# EAGLE board BlueBus (EAGLE 9.6.2)
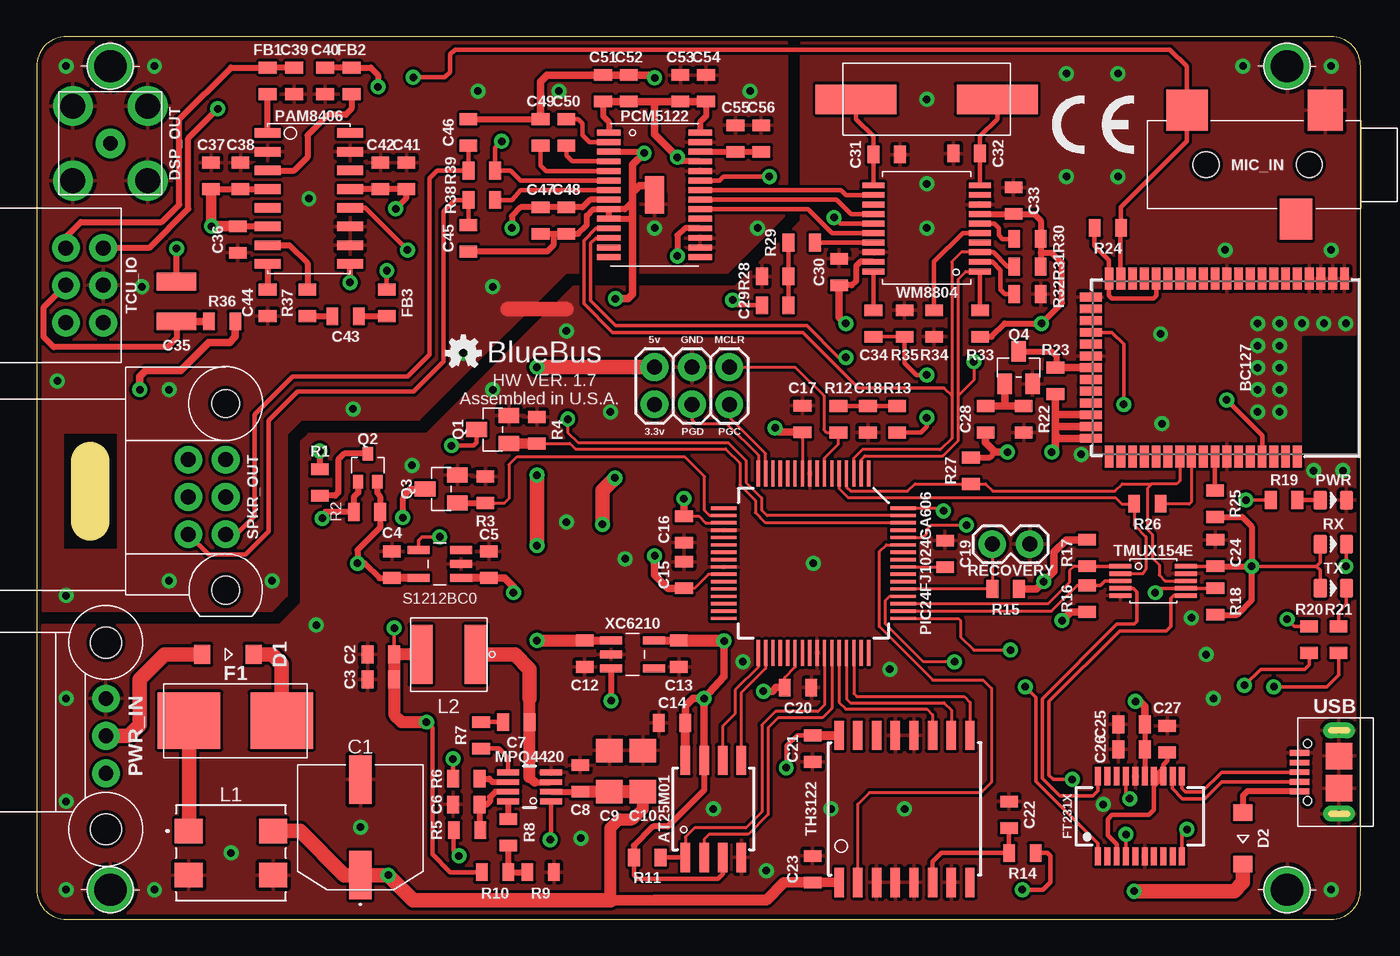
[diagram p0: board, top side]
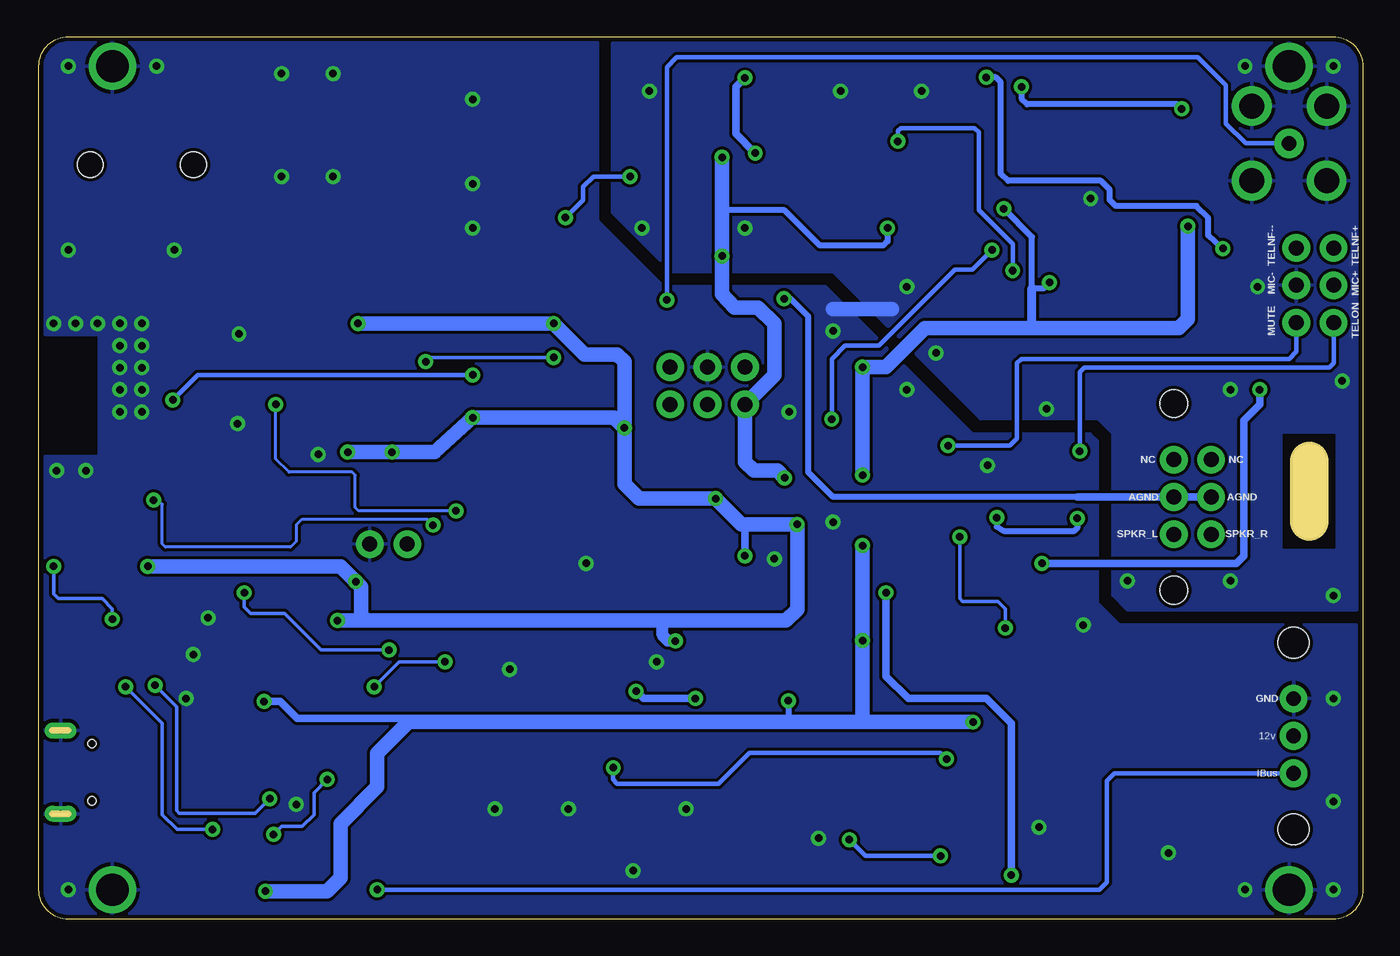
[diagram p1: board, bottom side, seen from below]

Size 90 x 60 mm. Coordinates in mm from the lower left corner, seen from the top.
Outline: 0,58 0,2 arc90 2,0 88,0 arc90 90,2 90,58 arc90 88,60 2,60 arc90 0,58
Copper layers (1*16): Top 0.035mm / dielectric 1.5mm / Bottom 0.035mm
Design rules "SparkFun": minimum track width 8mil, minimum drill 20mil, track to track 8mil, track to pad 8mil, pad to pad 7mil, via to via 8mil, smd to smd 7mil, copper to edge 10mil, drill to drill 8mil, minimum pad ring 12mil, minimum via ring 10mil, stop-mask expansion 4mil, vias tented up to drill 0.52mm, thermal gap 10mil
Net classes: 0 default: width 0.25 mm, drill 0.51 mm; 1 5V: width 0.55 mm, drill 0.51 mm; 2 3.3V: width 0.22 mm, drill 0.51 mm; 3 VIN: width 0.3 mm, drill 0.51 mm; 4 Data: width 0.25 mm, drill 0.51 mm; 5 MCU_Data: width 0.22 mm, drill 0.51 mm; 6 USB_5V: width 0.25 mm, drill 0.51 mm; 7 MCU_3V3: width 0.22 mm, drill 0.51 mm

## Footprints (pad centres in the part's own frame; a part is rotated, then mirrored left to right if it is on the bottom)
SOIJ-8 = smd 0.65 x 2: 1 -1.905,-3.3; 2 -0.635,-3.3; 3 0.635,-3.3; 4 1.905,-3.3; 5 1.905,3.3; 6 0.635,3.3; 7 -0.635,3.3; 8 -1.905,3.3
BC127 = smd 1.5 x 0.6: 1 -6.05,8.1; 2 -6.05,7.3; 3 -6.05,6.5; 4 -6.05,5.7; 5 -6.05,4.9; 6 -6.05,4.1; 7 -6.05,3.3; 8 -6.05,2.5; 9 -6.05,1.7; 10 -6.05,0.9; 11 -6.05,0.1; 12 -6.05,-0.7; 13 -6.05,-1.5; 14 -6.05,-2.3; 15 -6.05,-3.1; 16 -6.05,-3.9; 17 -6.05,-4.7; 18 -6.05,-5.5; 19 -6.05,-6.3; 20 -6.05,-7.1; 21 -6.05,-7.9; 35 6.05,-7.9; 36 6.05,-7.1; 37 6.05,-6.3; 38 6.05,-5.5; 39 6.05,-4.7; 40 6.05,-3.9; 41 6.05,-3.1; 42 6.05,-2.3; 43 6.05,-1.5; 44 6.05,-0.7; 45 6.05,0.1; 46 6.05,0.9; 47 6.05,1.7; 48 6.05,2.5; 49 6.05,3.3; 50 6.05,4.1; 51 6.05,4.9 | smd 0.6 x 1.5: 22 -4.8,-9.15; 23 -4,-9.15; 24 -3.2,-9.15; 25 -2.4,-9.15; 26 -1.6,-9.15; 27 -0.8,-9.15; 28 0,-9.15; 29 0.8,-9.15; 30 1.6,-9.15; 31 2.4,-9.15; 32 3.2,-9.15; 33 4,-9.15; 34 4.8,-9.15
RHS1V101MCN1GS = smd 3.3 x 1.5: 1 -3.25,0; 2 3.25,0
0805 = smd 0.8 x 1.2: 1 -0.9,0; 2 0.9,0
1206 = smd 1.6 x 1.8: 1 -1.4,0; 2 1.4,0
1210 = smd 1.2 x 2.7: 1 -1.35,0; 2 1.35,0
SOD123FL-2 = smd 1.1 x 1.3: A 1.75,0; C -1.75,0
MOLEX_SMB = drill 1.7 pad 2.7: 1 -2.54,2.54; 2 2.54,2.54; 3 2.54,-2.54; 4 -2.54,-2.54 | drill 1 pad 2: P$1 0,0
LITTLEFUSE = smd 3.81 x 4.242: IN 0,3.151; OUT 0,-3.151
SSOP20_L = smd 0.4 x 1.25: 1 -2.857,-2.725; 2 -2.223,-2.725; 3 -1.587,-2.725; 4 -0.953,-2.725; 5 -0.318,-2.725; 6 0.318,-2.725; 7 0.953,-2.725; 8 1.587,-2.725; 9 2.223,-2.725; 10 2.857,-2.725; 11 2.857,2.725; 12 2.223,2.725; 13 1.587,2.725; 14 0.953,2.725; 15 0.318,2.725; 16 -0.318,2.725; 17 -0.953,2.725; 18 -1.587,2.725; 19 -2.223,2.725; 20 -2.857,2.725
2.2-PAD = drill 2.2 pad 3: B2.2 0,0
ACM70V-701-2PL-TL00 = smd 1.905 x 1.651: 1 -2.857,1.5; 2 -2.857,-1.5; 3 2.857,-1.5; 4 2.857,1.5
MPL-SE5040 = smd 1.5 x 4: 1 1.85,0; 2 -1.85,0
AUDIO-CUI-SJ-352X-SMT = smd 2.2 x 2.8: RING 4.4,3.7 | smd 2.4 x 2.8: SLEEVE 2.4,-3.7 | smd 2.8 x 2.8: TIP 11.8,-3.7 | hole 1.75: 3.5,0; 10.5,0
TSOT23-8 = smd 0.4 x 1.5: 1 -0.975,-1.45; 2 -0.325,-1.45; 3 0.325,-1.45; 4 0.975,-1.45; 5 0.975,1.45; 6 0.325,1.45; 7 -0.325,1.45; 8 -0.975,1.45
SOP-16 = smd 0.65 x 1.75: 1 -4.45,-2.8; 2 -3.18,-2.8; 3 -1.91,-2.8; 4 -0.64,-2.8; 5 0.63,-2.8; 6 1.9,-2.8; 7 3.17,-2.8; 8 4.44,-2.8; 9 4.44,2.8; 10 3.17,2.8; 11 1.9,2.8; 12 0.63,2.8; 13 -0.64,2.8; 14 -1.91,2.8; 15 -3.18,2.8; 16 -4.45,2.8
TSSOP28 = smd 1.6 x 0.4: 1 -3.1,4.225; 2 -3.1,3.575; 3 -3.1,2.925; 4 -3.1,2.275; 5 -3.1,1.625; 6 -3.1,0.975; 7 -3.1,0.325; 8 -3.1,-0.325; 9 -3.1,-0.975; 10 -3.1,-1.625; 11 -3.1,-2.275; 12 -3.1,-2.925; 13 -3.1,-3.575; 14 -3.1,-4.225; 15 3.1,-4.225; 16 3.1,-3.575; 17 3.1,-2.925; 18 3.1,-2.275; 19 3.1,-1.625; 20 3.1,-0.975; 21 3.1,-0.325; 22 3.1,0.325; 23 3.1,0.975; 24 3.1,1.625; 25 3.1,2.275; 26 3.1,2.925; 27 3.1,3.575; 28 3.1,4.225
TQFP64 = smd 0.22 x 1.75: 1 -3.75,-6.1; 2 -3.25,-6.1; 3 -2.75,-6.1; 4 -2.25,-6.1; 5 -1.75,-6.1; 6 -1.25,-6.1; 7 -0.75,-6.1; 8 -0.25,-6.1; 9 0.25,-6.1; 10 0.75,-6.1; 11 1.25,-6.1; 12 1.75,-6.1; 13 2.25,-6.1; 14 2.75,-6.1; 15 3.25,-6.1; 16 3.75,-6.1; 33 3.75,6.1; 34 3.25,6.1; 35 2.75,6.1; 36 2.25,6.1; 37 1.75,6.1; 38 1.25,6.1; 39 0.75,6.1; 40 0.25,6.1; 41 -0.25,6.1; 42 -0.75,6.1; 43 -1.25,6.1; 44 -1.75,6.1; 45 -2.25,6.1; 46 -2.75,6.1; 47 -3.25,6.1; 48 -3.75,6.1 | smd 1.75 x 0.22: 17 6.1,-3.75; 18 6.1,-3.25; 19 6.1,-2.75; 20 6.1,-2.25; 21 6.1,-1.75; 22 6.1,-1.25; 23 6.1,-0.75; 24 6.1,-0.25; 25 6.1,0.25; 26 6.1,0.75; 27 6.1,1.25; 28 6.1,1.75; 29 6.1,2.25; 30 6.1,2.75; 31 6.1,3.25; 32 6.1,3.75; 49 -6.1,3.75; 50 -6.1,3.25; 51 -6.1,2.75; 52 -6.1,2.25; 53 -6.1,1.75; 54 -6.1,1.25; 55 -6.1,0.75; 56 -6.1,0.25; 57 -6.1,-0.25; 58 -6.1,-0.75; 59 -6.1,-1.25; 60 -6.1,-1.75; 61 -6.1,-2.25; 62 -6.1,-2.75; 63 -6.1,-3.25; 64 -6.1,-3.75
2X3 = drill 1.016 pad 1.88: 1 0,0; 2 0,2.54; 3 2.54,0; 4 2.54,2.54; 5 5.08,0; 6 5.08,2.54
LED-0805 = smd 0.889 x 1.27: + -0.889,0; - 0.889,0
TE_MQS_3PIN = drill 1 pad 1.88: 1 0,0; 2 2.54,0; 3 5.08,0 | hole 2.1: -3.81,0; 8.89,0
SOT-23 = smd 1 x 1.4: 1 -0.95,-1.1; 2 0.95,-1.1; 3 0,1.1
SOT323 = smd 0.7 x 0.9: 1 -0.65,-0.95; 2 0.65,-0.95; 3 0,0.95
1X02 = drill 1.016 pad 1.88: 1 0,0; 2 2.54,0
SOT23-5 = smd 0.55 x 1.5: 1 -0.95,-1.45; 2 0,-1.45; 3 0.95,-1.45; 4 0.95,1.45; 5 -0.95,1.45
SHORT_TOP-50 = smd 1.27 x 1.27: 1 0.635,0; 2 -0.635,0
TE_MQS_6PIN = drill 1.016 pad 1.88: 1 5.08,2.54; 2 2.54,2.54; 3 0,2.54; 4 5.08,0; 5 2.54,0; 6 0,0 | hole 1.9: -3.81,2.54; 8.89,2.54
TE_AMPMODU_6_PIN = drill 1.016 pad 1.88: 1 -2.54,-1.27; 2 -2.54,1.27; 3 0,-1.27; 4 0,1.27; 5 2.54,-1.27; 6 2.54,1.27
SOIC16DF = smd 0.635 x 2: 1 -4.45,-5; 2 -3.18,-5; 3 -1.91,-5; 4 -0.64,-5; 5 0.63,-5; 6 1.9,-5; 7 3.17,-5; 8 4.44,-5; 9 4.44,5; 10 3.17,5; 11 1.9,5; 12 0.63,5; 13 -0.64,5; 14 -1.91,5; 15 -3.18,5; 16 -4.45,5
VSSOP10 = smd 1.5 x 0.3: 1 -2.225,1; 2 -2.225,0.5; 3 -2.225,0; 4 -2.225,-0.5; 5 -2.225,-1; 6 2.225,-1; 7 2.225,-0.5; 8 2.225,0; 9 2.225,0.5; 10 2.225,1
USB3080-30-01-A = smd 0.4 x 1.35: 1 -1.3,0; 2 -0.65,0; 3 0,0; 4 0.65,0; 5 1.3,0 | drill 0.45 pad 1.075 long: MNT1 -2.825,-2.68; MNT2 2.825,-2.68 | smd 1.8 x 1.8: MNT3 -1.1,-2.68; MNT4 1.1,-2.68 | hole 0.55: -1.95,-0.53; 1.95,-0.53
SSOP20 = smd 0.4 x 1.5: 1 -2.955,-3.625; 2 -2.305,-3.625; 3 -1.655,-3.625; 4 -1.005,-3.625; 5 -0.355,-3.625; 6 0.295,-3.625; 7 0.945,-3.625; 8 1.595,-3.625; 9 2.245,-3.625; 10 2.895,-3.625; 11 2.895,3.625; 12 2.245,3.625; 13 1.595,3.625; 14 0.945,3.625; 15 0.295,3.625; 16 -0.355,3.625; 17 -1.005,3.625; 18 -1.655,3.625; 19 -2.305,3.625; 20 -2.955,3.625
HC49 = smd 5.5 x 2: 1 -4.8,0; 2 4.8,0

## Placement (x,y rotation side)
AT25M01  AT25M01-SHM  [SOIJ-8]  46,7.5 0 top
BC127  BC127  [BC127]  80.8,37.5 270 top
C1  RHS1V101MCN1GS  [RHS1V101MCN1GS]  22,6.25 90 top
C2  22uF  [0805]  23.4,18 180 top
C3  22uF  [0805]  23.4,16.3 180 top
C4  2.2uF  [0805]  24.14,24.11 90 top
C5  1uF  [0805]  30.74,24.1 90 top
C6  0.1uF  [0805]  29.2,7.8 180 top
C7  0.1uF  [0805]  32.6,13.4 0 top
C8  0.1uF  [0805]  36.95,9.57 90 top
C9  10uF  [1206]  38.92,10.07 90 top
C10  10uF  [1206]  41.2,10.07 90 top
C12  1uF  [0805]  37.25,18.05 270 top
C13  1uF  [0805]  43.65,18.05 270 top
C14  0.1uF  [0805]  43.19,13.35 180 top
C15  0.1uF  [0805]  44,23.4 270 top
C16  0.1uF  [0805]  44,26.5 90 top
C17  0.1uF  [0805]  52.05,34.01 270 top
C18  0.1uF  [0805]  56.5,34 270 top
C19  10uF  [0805]  61.75,24.84 90 top
C20  0.1uF  [0805]  51.75,15.75 180 top
C21  2.2uF  [0805]  52.75,11.6 90 top
C22  0.0001UF  [0805]  66.1,7.1 90 top
C23  47nF  [0805]  52.75,3.4 90 top
C24  0.1uF  [0805]  80.12,24.9 90 top
C25  0.1uF  [0805]  74.42,13.25 180 top
C26  10uF  [0805]  74.42,11.55 180 top
C27  0.1uF  [0805]  76.85,12.25 90 top
C28  470NF  [0805]  64.5,34 90 top
C29  0.1uF  [0805]  50.2,41.75 0 top
C30  0.1uF  [0805]  54.55,44 90 top
C31  20pF  [0805]  57.78,52 0 top
C32  20pF  [0805]  63.22,52.06 180 top
C33  1uF  [0805]  66.4,48.85 90 top
C34  0.1uF  [0805]  56.88,40.5 270 top
C35  47UF1210  [1210]  9.5,42 270 top
C36  1uF  [0805]  13.67,46.21 270 top
C37  10uF  [0805]  11.85,50.54 90 top
C38  1uF  [0805]  13.85,50.54 90 top
C39  220pF  [0805]  17.5,57 270 top
C40  220pF  [0805]  19.6,57 270 top
C41  10uF  [0805]  25.13,50.54 90 top
C42  1uF  [0805]  23.37,50.54 90 top
C43  1uF  [0805]  21,41 180 top
C44  1uF  [0805]  15.7,41.9 270 top
C45  10nF  [0805]  29.35,46.3 270 top
C46  10nF  [0805]  29.35,53.5 90 top
C47  10uF  [0805]  34.25,47.5 270 top
C48  0.1uF  [0805]  36,47.5 270 top
C49  2.2uF  [0805]  34.25,53.5 270 top
C50  2.2uF  [0805]  36,53.5 270 top
C51  0.1uF  [0805]  38.5,56.5 90 top
C52  10uF  [0805]  40.25,56.5 90 top
C53  10uF  [0805]  43.75,56.5 90 top
C54  0.1uF  [0805]  45.5,56.5 90 top
C55  0.1uF  [0805]  47.5,53.08 90 top
C56  10uF  [0805]  49.25,53.08 90 top
CE  [CE-4MM]  69,52 0 top
D1  2A_150V  [SOD123FL-2]  13,18 180 top
D2  2A_150V  [SOD123FL-2]  82,5.5 90 top
DSP_OUT  SMB_CONN  [MOLEX_SMB]  5,52.75 180 top
F1  750mA  [LITTLEFUSE]  13.5,13.5 270 top
FB1  2A/120OHM  [0805]  15.7,57 90 top
FB2  2A/120OHM  [0805]  21.4,57 90 top
FB3  2A/120OHM  [0805]  23.8,41.9 270 top
FRAME1  FRAME-LETTER  [DUMMY]  45,61 0 top
FRAME2  FRAME-LETTER  [DUMMY]  45,61 0 top
FRAME3  FRAME-LETTER  [DUMMY]  45,61 0 top
FRAME4  FRAME-LETTER  [DUMMY]  45,61 0 top
FRAME5  FRAME-LETTER  [DUMMY]  45,61 0 top
FT231X  FT231XS  [SSOP20_L]  75,7 0 top
H1  2,2-PAD  [2.2-PAD]  5,2 0 top
H2  2,2-PAD  [2.2-PAD]  5,58 0 top
H3  2,2-PAD  [2.2-PAD]  85,2 0 top
H4  2,2-PAD  [2.2-PAD]  85,58 0 top
L1  ACM70V-701-2PL-TL00  [ACM70V-701-2PL-TL00]  13.2,4.5 0 top
L2  10uH  [MPL-SE5040]  28,18 0 top
MIC_IN  AUDIO-CUI-SJ-3523-SMT  [AUDIO-CUI-SJ-352X-SMT]  90,51.3 180 top
MPQ4420  MPQ4420  [TSOT23-8]  33.5,9 90 top
OSHW  [OSHW-LOGO-MINI]  29,38.5 0 top
PAM8406  PAM8406  [SOP-16]  18.5,49 270 top
PCM5122  PCM5122  [TSSOP28]  42,49.25 0 top
PIC24FJ1024GA606  PIC24FJ1024GA606  [TQFP64]  52.8,24.2 180 top
PICKIT  6PIN_JUMPER  [2X3]  42,35 0 top
PWR  LED_GREEN  [LED-0805]  88.15,28.5 0 top
PWR_IN  3PIN_953442_1  [TE_MQS_3PIN]  4.7,15 270 top
Q1  NMOSFET-BSS138K  [SOT-23]  31,33.3 90 top
Q2  PMOSFET-DMP32D4SSOT323  [SOT323]  22.5,30.7 0 top
Q3  NMOSFET-BSS138K  [SOT-23]  27.5,29.25 90 top
Q4  FDV301N  [SOT-23]  66.75,37.5 0 top
R1  4.7k  [0805]  19.25,29.7 90 top
R2  10k  [0805]  22.45,27.69 0 top
R3  10k  [0805]  30.5,29.2 270 top
R4  10k  [0805]  34,33.25 270 top
R5  100k  [0805]  29.25,6.05 0 top
R6  100k  [0805]  29.2,9.55 180 top
R7  20OHM  [0805]  30.2,12.5 90 top
R8  51KOHM  [0805]  32.05,5.9 90 top
R9  7.68KOHM  [0805]  34.25,3.2 180 top
R10  41.2KOHM  [0805]  31.15,3.2 180 top
R11  4.7k  [0805]  41.5,4.2 180 top
R12  210  [0805]  54.5,34 270 top
R13  10k  [0805]  58.5,34 90 top
R14  10  [0805]  67,4.5 180 top
R15  10k  [0805]  65.86,22.45 0 top
R16  100k  [0805]  71.4,21.8 270 top
R17  10k  [0805]  71.4,24.9 270 top
R18  100k  [0805]  80.12,21.6 270 top
R19  2k  [0805]  84.8,28.5 180 top
R20  2k  [0805]  86.5,19 270 top
R21  2k  [0805]  88.5,19 270 top
R22  100k  [0805]  67.1,34 90 top
R23  100k  [0805]  69.25,36.6 90 top
R24  2k  [0805]  72.81,47 180 top
R25  10k  [0805]  80.1,28.25 270 top
R26  10k  [0805]  75.5,28.25 180 top
R27  10k  [0805]  63.5,30.5 90 top
R28  110  [0805]  50.2,43.7 0 top
R29  210  [0805]  52,46 0 top
R30  10k  [0805]  67.35,46.25 180 top
R31  4.7k  [0805]  67.35,44.38 180 top
R32  10k  [0805]  67.35,42.5 180 top
R33  4.7k  [0805]  64.13,40.5 90 top
R34  10k  [0805]  61,40.5 90 top
R35  75  [0805]  59,40.5 270 top
R36  10k  [0805]  12.6,40.65 180 top
R37  18k  [0805]  18.4,41.9 90 top
R38  100  [0805]  30.25,48.9 180 top
R39  100  [0805]  30.25,50.9 180 top
RECOVERY  2PIN_JUMPER  [1X02]  67.5,25.5 180 top
RX  LED_GREEN  [LED-0805]  88.15,25.5 0 top
S1212BC0  S-1212BC0-M5T1U  [SOT23-5]  27.4,24.15 90 top
SH1  SHORTT5  [SHORT_TOP-50]  42,49.25 270 top
SPKR_OUT  6PIN_953442_1  [TE_MQS_6PIN]  10.3,31.25 270 top
TCU_IO  6PIN_5_103166_1  [TE_AMPMODU_6_PIN]  3.25,43.1 270 top
TH3122  TH3122.4  [SOIC16DF]  59,7.5 0 top
TMUX154E  TMUX154E  [VSSOP10]  75.9,23 0 top
TX  LED_RED  [LED-0805]  88.15,22.5 0 top
USB  USB3080-30-01-A  [USB3080-30-01-A]  85.85,10 90 top
WM8804  WM8804  [SSOP20]  60.5,47 90 top
X1  CRYSTAL-12MHZ  [HC49]  60.5,55.75 180 top
XC6210  [SOT23-5]  40.5,18 270 top

## Library data of the parts
AT25M01 BC127 FT231X MPQ4420 PAM8406 PCM5122 PIC24FJ1024GA606 S1212BC0 TH3122 TMUX154E WM8804 XC6210 = ICs
C1 = Passives; MFG: Nichicon; PN: RHS1V101MCN1GS
C2 C3 = Passives; DEVICE: 22uF-0805-6.3v-10%; MFG: TDK; PACKAGE: 0805; PN: C2012X5R0J226K125AB
C4 C21 C49 C50 = Passives; DEVICE: 2.2uF-0805-25V-10%; MFG: TDK; PACKAGE: 0805; PN: CGB4B1X5R1E225K055AC
C5 C12 C13 C33 C36 C38 C42-C44 = Passives; DEVICE: 1uF-0805-50v-10%; MFG: TDK; PACKAGE: 0805; PN: CGA4J3X7R1H105K125AB
C6-C8 C14-C18 C20 C24 C25 C27 C29 C30 C34 C48 C51 C54 C55 = Passives; DEVICE: 0.1uF-0805-50V; MFG: KEMET; PACKAGE: 0805; PN: C0805C104J5RACAUTO
C9 C10 = Passives; DEVICE: 10UF-1206-50V-10%; MFG: TDK; PACKAGE: 1206; PN: CGA5L3X5R1H106K160AB
C19 C26 C37 C41 C47 C52 C53 C56 = Passives; DEVICE: 10UF-0805-35V-10%; MFG: TDK; PACKAGE: 0805; PN: C2012X5R1V106K125AC
C22 C35 PWR Q1-Q4 R7-R10 R12 R28 R29 RX TX = Passives
C23 = Passives; DEVICE: 47NF-0805-25V; MFG: AVX; PACKAGE: 0805; PN: 08053C473KAT4A
C28 = Passives; MFG: TDK; PN: CGA4J2X7R1E474K125AA
C31 C32 = Passives; DEVICE: 20pF-0805-50v-5%; PACKAGE: 0805; PN: C0805X200J5GAC7800
C39 C40 = Passives; DEVICE: 220PF-0805-50V-5%; MFG: KEMET; PACKAGE: 0805; PN: C0805X221J5HACAUTO
C45 C46 = Passives; DEVICE: 10NF-0805-50V; MFG: KEMET; PACKAGE: 0805; PN: C0805C103J5GEC7210
CE = logo
D1 D2 = Passives; MFG: MCC
DSP_OUT H1-H4 MIC_IN PICKIT PWR_IN RECOVERY SPKR_OUT TCU_IO = Connectors
F1 = Passives; MFG: LITTLEBLOCK; PN: 0154.750DRT
FB1-FB3 = Passives; MFG: BOURNS; PN: MH2029-121Y
FRAME1-FRAME5 = Frame
L1 = Passives; MFG: TDK; PN: ACM70V-701-2PL-TL00
L2 = Passives; MFG: MPS; PN: MPL-SE5040-100
OSHW = SparkFun-Aesthetics
R1 R11 R31 R33 = Passives; DEVICE: 4.7kOHM-0805-1/8-1%; MFG: Panasonic; PACKAGE: 0805; PN: ERJ-6ENF4701V
R2-R4 R13 R15 R17 R25-R27 R30 R32 R34 R36 = Passives; DEVICE: 10KOHM-0805-1/8-1%; MFG: Panasonic; PACKAGE: 0805; PN: ERJ-6ENF1002V
R5 R6 R16 R18 R22 R23 = Passives; DEVICE: 100KOHM-0805-1/8-1%; PN: ERJ-6ENF1003V
R14 = Passives; DEVICE: 10OHM-0805-1/8-1%; MFG: Panasonic; PACKAGE: 0805; PN: ERJ-S06F10R0V
R19-R21 R24 = Passives; DEVICE: 2KOHM-0805-.4-1%; MFG: ROHM; PACKAGE: 0805; PN: ESR10EZPF2001
R35 = Passives; DEVICE: 75OHM-0805-1/2-1%; MFG: Panasonic; PN: ERJ-P06F75R0V
R37 = Passives; DEVICE: 18KOHM-0805-1/8-1%; MFG: Panasonic; PACKAGE: 0805; PN: ERJ-6ENF1802V
R38 R39 = Passives; MFG: PANASONIC; PN: ERA-6AED101V
SH1 = shorts; BOM: no
USB = Connectors; MFG: GCT
X1 = Passives; PN: LFXTAL035293REEL

## Nets
3.3V [3.3V]: AT25M01.3 AT25M01.7 AT25M01.8 BC127.32 BC127.33 BC127.34 C13.1 C14.1 C15.2 C16.2 C17.2 C20.2 C24.1 C28.1 C30.1 C33.1 C47.1 C48.1 C51.1 C52.1 C53.1 C54.1 PCM5122.1 PCM5122.8 PCM5122.18 PCM5122.25 PCM5122.28 PIC24FJ1024GA606.10 PIC24FJ1024GA606.19 PIC24FJ1024GA606.26 PIC24FJ1024GA606.38 PICKIT.1 R11.2 R13.1 R15.2 R16.2 R17.1 R18.2 R23.1 R25.2 R27.2 R30.1 R31.1 R33.1 RX.+ TMUX154E.10 TX.+ WM8804.7 WM8804.19 XC6210.5
5V [USB_5V]: C2.1 C3.1 C12.1 C25.1 C26.1 C36.1 C37.1 C38.1 C41.1 C42.1 D2.C FT231X.15 L2.2 PAM8406.4 PAM8406.6 PAM8406.9 PAM8406.13 PICKIT.2 R10.2 S1212BC0.4 XC6210.1 XC6210.3
5VREG_BS: MPQ4420.5 R7.1
5VREG_BS_CAP: C7.1 R7.2
5VREG_EN: MPQ4420.6 R6.1
5VREG_FB: MPQ4420.8 R8.2
5VREG_FB_T: R8.1 R9.2 R10.1
5VREG_PG: MPQ4420.1 R5.1
5VREG_SW: C7.2 L2.1 MPQ4420.3
5VREG_VCC: C6.1 MPQ4420.7 R5.2
12V [VIN]: C4.1 Q2.2 R2.2 R36.1 S1212BC0.5
AGND: C45.2 C46.2 C47.2 C48.2 C49.1 C51.2 C52.2 PCM5122.3 PCM5122.9 PCM5122.10 SH1.2 SPKR_OUT.2 SPKR_OUT.5
BT_DATA_IO [MCU_Data]: BC127.25 PIC24FJ1024GA606.64
BT_DOUT: BC127.48 C34.2 R35.2
BT_MIC_BIAS: BC127.17 BC127.21 R24.2
BT_MIC_L: BC127.20 C35.1 MIC_IN.TIP R24.1
BT_RST: BC127.44 R25.1
BT_URX [MCU_Data]: PIC24FJ1024GA606.5 R26.2 TMUX154E.2
BT_URX_RES [MCU_Data]: BC127.42 R26.1
BT_UTX [MCU_Data]: BC127.41 PIC24FJ1024GA606.4 R27.1 TMUX154E.8
BT_VREGEN: BC127.28 Q4.3 R23.2
BT_VREGEN_CAP_GATE: C28.2 Q4.1 R22.2
CHG_EXT: BC127.29
DAC_CAPM: C50.2 PCM5122.4
DAC_CAPP: C50.1 PCM5122.2
DAC_LDOO: C55.1 C56.1 PCM5122.26
DAC_OUT_L: FB3.1 PCM5122.6 R39.1
DAC_OUT_R: PCM5122.7 R38.1
DAC_VNEG: C49.2 PCM5122.5
EE_CS [MCU_Data]: AT25M01.1 PIC24FJ1024GA606.42 R11.1
EE_SCK [MCU_Data]: AT25M01.6 PIC24FJ1024GA606.33
EE_SI [MCU_Data]: AT25M01.5 PIC24FJ1024GA606.34
EE_SO [MCU_Data]: AT25M01.2 PIC24FJ1024GA606.43
GND: AT25M01.4 BC127.1 BC127.2 BC127.3 BC127.4 BC127.11 BC127.22 BC127.27 BC127.45 C1.2 C2.2 C3.2 C4.2 C5.2 C6.2 C8.2 C9.2 C10.2 C12.2 C13.2 C14.2 C15.1 C16.1 C17.1 C18.2 C19.2 C20.1 C21.1 C22.2 C23.2 C24.2 C25.2 C26.2 C27.2 C30.2 C31.2 C32.2 C33.2 C36.2 C37.2 C38.2 C39.2 C40.2 C41.2 C42.2 C44.2 C53.2 C54.2 C55.2 C56.2 DSP_OUT.1 DSP_OUT.2 DSP_OUT.3 DSP_OUT.4 FT231X.6 FT231X.16 H1.B2.2 H2.B2.2 H3.B2.2 H4.B2.2 L1.2 L1.3 MIC_IN.SLEEVE MPQ4420.4 PAM8406.2 PAM8406.10 PAM8406.11 PAM8406.15 PCM5122.16 PCM5122.17 PCM5122.24 PCM5122.27 PIC24FJ1024GA606.9 PIC24FJ1024GA606.20 PIC24FJ1024GA606.25 PIC24FJ1024GA606.41 PICKIT.4 PWR.- PWR_IN.1 Q1.2 Q3.2 Q4.2 R3.1 R4.1 R9.1 R22.1 R28.1 R32.1 R34.1 R35.1 RECOVERY.1 S1212BC0.2 SH1.1 TCU_IO.4 TH3122.3 TH3122.4 TH3122.5 TH3122.7 TH3122.12 TH3122.13 TMUX154E.5 TMUX154E.9 USB.5 USB.MNT1 USB.MNT2 USB.MNT3 USB.MNT4 WM8804.8 WM8804.18 XC6210.2
I2S_CLK: PCM5122.21 WM8804.14
I2S_DOUT: PCM5122.22 WM8804.12
I2S_LRCK: PCM5122.23 WM8804.15
I2S_SCK: PCM5122.20 WM8804.16
IBUS [Data]: PWR_IN.3 R14.1
IBUS_5V: C21.2 R6.2 TH3122.16
IBUS_EN [MCU_Data]: PIC24FJ1024GA606.59 TH3122.2
IBUS_FILT: C22.1 R14.2 TH3122.6
IBUS_URX [MCU_Data]: PIC24FJ1024GA606.45 TH3122.10
IBUS_USTA [MCU_Data]: PIC24FJ1024GA606.46 TH3122.9
IBUS_UTX [MCU_Data]: PIC24FJ1024GA606.44 TH3122.11
MCU_MCLR [MCU_Data]: PIC24FJ1024GA606.7 PICKIT.6 R12.2
MCU_MCLR_RES [MCU_Data]: C18.1 R12.1 R13.2
MCU_ON_LED [MCU_Data]: PIC24FJ1024GA606.60 R19.2
MCU_ON_LED_RES: PWR.+ R19.1
MCU_PGC [MCU_Data]: PIC24FJ1024GA606.15 PICKIT.5
MCU_PGD [MCU_Data]: PIC24FJ1024GA606.16 PICKIT.3
MCU_RECOV [MCU_Data]: PIC24FJ1024GA606.53 R15.1 RECOVERY.2
MCU_SCK3 [MCU_Data]: PCM5122.12 PIC24FJ1024GA606.2 R33.2 WM8804.1
MCU_SDA3 [MCU_Data]: PCM5122.11 PIC24FJ1024GA606.3 R31.2 WM8804.3
MCU_TEL_MUTE [MCU_Data]: PIC24FJ1024GA606.62 Q1.1 R4.2
MCU_TEL_ON [MCU_Data]: PIC24FJ1024GA606.18 Q3.1 R3.2
MCU_URX [MCU_Data]: PIC24FJ1024GA606.50 R16.1 TMUX154E.3
MCU_UTX [MCU_Data]: PIC24FJ1024GA606.49 R18.1 TMUX154E.7
MCU_VCAP [MCU_Data]: C19.1 PIC24FJ1024GA606.56
SPDIF_OUT: C29.1 DSP_OUT.P$1
SPDIF_RX: C34.1 WM8804.20
SPKR_OUT_L: C46.1 R39.2 SPKR_OUT.1
SPKR_OUT_R: C45.1 R38.2 SPKR_OUT.4
SYS_DTR [MCU_Data]: FT231X.1 PIC24FJ1024GA606.52
SYS_RX_LED: FT231X.17 R20.2
SYS_RX_LED_RES: R20.1 RX.-
SYS_TX_LED: FT231X.10 R21.2
SYS_TX_LED_RES: R21.1 TX.-
SYS_UART_SEL [MCU_Data]: PIC24FJ1024GA606.51 R17.2 TMUX154E.1
SYS_URX: FT231X.4 TMUX154E.6
SYS_USB_DN [Data]: FT231X.12 USB.2
SYS_USB_DP [Data]: FT231X.11 USB.3
SYS_UTX: FT231X.20 TMUX154E.4
TEL_AMP_IN: C43.1 FB3.2
TEL_AMP_INL: PAM8406.7 R37.2
TEL_AMP_INL_CAP_RES: C43.2 R37.1
TEL_AMP_OUT_L+: FB1.1 PAM8406.1
TEL_AMP_OUT_L-: FB2.1 PAM8406.3
TEL_AMP_SHDN [MCU_Data]: PAM8406.12 PIC24FJ1024GA606.63
TEL_AMP_VREF: C44.1 PAM8406.8
TEL_MIC_L_OUT: C35.2 R36.2 TCU_IO.3
TEL_MUTE_IO: Q1.3 TCU_IO.6
TEL_ON: Q2.3 R1.1
TEL_ON_EN: Q2.1 Q3.3 R2.1
TEL_ON_IO: R1.2 TCU_IO.5
TEL_OUT_L+: C39.1 FB1.2 TCU_IO.1
TEL_OUT_L-: C40.1 FB2.2 TCU_IO.2
USB_3V3: C27.1 FT231X.3 FT231X.13 FT231X.14
USB_5V: D2.A USB.1
VBAT: D1.A PWR_IN.2
VBAT_DIODE: D1.C F1.IN
VBAT_FUSE: F1.OUT L1.1
VBAT_SENSE: BC127.31
VCHG: BC127.30
VIN [VIN]: C1.1 C5.1 C8.1 C9.1 C10.1 C23.1 L1.4 MPQ4420.2 S1212BC0.1 TH3122.1
WM_CSB: R34.2 WM8804.5
WM_GPO0: R32.2 WM8804.2
WM_RESETB: R30.2 WM8804.6
WM_SPDIF_TX_RES: R29.2 WM8804.17
WM_SPDIF_TX_RES2: C29.2 R28.2 R29.1
WM_XIN: C31.1 WM8804.11 X1.2
WM_XOP: C32.1 WM8804.10 X1.1

## Tracks (layer width: path | path; a pad name or v marks a point on that pad's centre or on a via)
3.3V  (via drill 0.51)
  Top 0.22: C17.2 PIC24FJ1024GA606.10 | PIC24FJ1024GA606.38 51.55,17.15 50.85,16.45 C20.2 | C16.2 45.02,27.4 45.47,26.95 PIC24FJ1024GA606.19 | PIC24FJ1024GA606.26 45.65,23.45 44.7,22.5 C15.2
  Top 0.25: TMUX154E.10 C24.1 | v82.6,24 87,24 | 87,24 87.26,24.26 RX.+ | 87,24 87.26,23.74 TX.+
  Top 0.3: R13.1 60.1,33.1 60.5,33.5 v60.5,34.1 | AT25M01.3 46.63,3.08 46.31,2.75 40.85,2.75 40.6,3 R11.2
  Top 0.4: C24.1 v82.6,24 | v82.6,24 82.6,26.7 81.95,27.35 R25.2 | R18.2 81.6,20.7 82.6,21.7 v82.6,24 | PCM5122.8 37.62,48.92 37.1,48.4 C48.1 C47.1 32.9,48.4 32.3,47.8 v32.3,47 | WM8804.7 C33.1 67.82,47.95 68.26,47.51 R30.1 68.25,45.3 | 68.25,45.3 R31.1 | 68.25,45.3 69,45.3 69.7,44.6 69.7,41.9 v68.3,40.5 65.8,40.5 64.9,39.6 R33.1 | WM8804.19 55.99,44.7 55.7,44.4 55.7,43.4 55.4,43.1 C30.1 | PCM5122.18 44.08,46.98 43.55,46.51 v43.55,45.1 | PCM5122.25 43.83,51.52 v43.55,51.8 | AT25M01.7 45.37,8.77 42.9,6.3 41.9,6.3 40.6,5 R11.2 | C51.1 38.5,54.6 38.9,54.2 PCM5122.1 | PCM5122.28 45.1,54.2 45.5,54.6 C54.1 | R27.2 64.8,31.4 65.15,31.75
  Top 0.5: C17.2 50.49,33.11 v50.2,33.4 | C30.1 54.55,40.95 v55,40.5 | R17.1 70,25.8 69.16,24.96 69.16,23.66 v68.45,22.95 67.95,22.45 R15.2 | v49.4,15.5 50,15.5 50.25,15.75 C20.2 | C16.2 v44,28.6 | C15.2 42.9,22.5 42,23.4 v42,24.7 | AT25M01.7 v45.37,15 | R16.2 70.3,20.9 v69.7,20.3 | v43.55,51.8 42,53.38 42,55.59 | 42,55.59 C52.1 C51.1 | 42,55.59 C53.1 C54.1 | 69.25,33.5 BC127.33 | 69.25,33.5 69.25,32.95 | C28.1 64.5,32.4 65.15,31.75 v66,31.75 | R23.1 69.25,34.3 | 69.25,34.3 69.25,33.5 | BC127.32 69.25,34.3 | BC127.34 69.5,32.7 69.25,32.95 | 69.25,32.95 69.25,32 v69,31.75 | v46.72,18.91 46.72,16.51 v45.37,15 | C14.1 44.1,14.5 44.6,15 v45.37,15
  Top 0.55: XC6210.5 C13.1
  Top 0.6: AT25M01.8 C14.1
  Top 0.8: v46.72,18.91 46.71,18.95 C13.1
  Top 1: v39.3,30 38.45,29.15 v38.45,26.85
  Bottom 0.4: v32.3,47 32.3,46.1 32.6,45.8 36.9,45.8 39.3,48.2 43.55,48.2
  Bottom 0.5: v42,24.7 42,26.6 42.25,26.85 | v45.37,15 48.9,15 v49.4,15.5
  Bottom 0.8: v46.72,18.91 47.23,18.93 47.6,19.3 47.6,20.3
  Bottom 1: v50.2,33.4 50.9,34.1 v60.5,34.1 63.1,31.75 v66,31.75 v69,31.75 | v50.2,33.4 50.2,37.9 50.7,38.4 52.9,38.4 v55,40.5 v68.3,40.5 | v43.55,51.8 43.55,48.2 v43.55,45.1 43.55,42.5 42.71,41.6 41.1,41.6 40,40.5 40,37 PICKIT.1 42,31.1 41.4,30.5 39.8,30.5 v39.3,30 | v50.2,33.4 50.2,29.6 49.2,28.6 v44,28.6 42.25,26.85 v38.45,26.85 v38.44,26.84 38.44,21.06 39.2,20.3 47.6,20.3 67.7,20.3 | 67.7,20.3 68.1,20.7 68.1,22.6 v68.45,22.95 69.5,24 v82.6,24 | 67.7,20.3 v69.7,20.3
5V  (via drill 0.51)
  Top 0.25: C2.1 v24.3,19.8 | S1212BC0.4 25.95,25.75 26.2,26 v27.4,26
  Top 0.3: R10.2 28.1,3.2 26.9,4.4 26.9,13 v26.5,13.4
  Top 0.35: C25.1 C26.1 75.33,9.69 FT231X.15
  Top 0.4: C37.1 C38.1 PAM8406.4 | C36.1 PAM8406.6 | PAM8406.13 C42.1 C41.1 25.13,49.03 v24.4,48.3 | v21.3,43.3 PAM8406.9 | XC6210.3 v39.05,14.85
  Top 0.5: v74.7,14.8 75,14.8 75.33,14.47 C25.1
  Top 0.55: C12.1 37.5,18.95 XC6210.1
  Top 0.7: C36.1 v11.89,47.11 11.85,47.15 C37.1
  Top 0.8: v26.5,13.4 24.8,13.4 24.3,13.9 C3.1 C2.1 L2.2 | v34,18.95 37.5,18.95
  Top 1: PICKIT.2 v34,37.54 | v34,25.4 v34,30.2 | v74.6,1.9 81.4,1.9 82,2.5 D2.C
  Bottom 0.25: v24.3,19.8 24.3,21.1 24.8,21.6 27.2,21.6 27.4,21.8 v27.4,26
  Bottom 0.4: v24.4,48.3 22.48,46.38 22.48,42.9 21.7,42.9 v21.3,43.3 | v39.05,14.85 39.05,13.45 39.1,13.4
  Bottom 0.5: 64.5,13.4 64.75,13.65 72.45,13.65 73.6,14.8 v74.7,14.8
  Bottom 0.6: 22.48,40.2 22.48,42.9
  Bottom 1: v74.6,1.9 70.4,1.9 69.5,2.8 69.5,6.5 67,9 67,11.28 64.88,13.4 64.5,13.4 39.1,13.4 33.7,13.4 | v11.89,47.11 11.89,40.81 12.5,40.2 22.48,40.2 29.75,40.2 32.41,37.54 v34,37.54 v34,30.2 | v26.5,13.4 33.7,13.4 | 33.7,13.4 34,13.7 v34,18.95 v34,25.4
5VREG_BS
  Top 0.3: R7.1 31.42,11.6 32.05,10.97 MPQ4420.5
5VREG_BS_CAP
  Top 0.3: R7.2 C7.1
5VREG_EN
  Top 0.4: R6.1 30.75,9.55 30.98,9.32 MPQ4420.6
5VREG_FB
  Top 0.4: MPQ4420.8 R8.2
5VREG_FB_T
  Top 0.4: R8.1 R10.1 R9.2
5VREG_PG  (via drill 0.51)
  Top 0.3: MPQ4420.1 34.95,5.45 v34.9,5.4 | R5.1 28.35,4.65 v28.7,4.3
  Bottom 0.3: v28.7,4.3 33.8,4.3 v34.9,5.4
5VREG_SW
  Top 0.4: 33.85,9.32 MPQ4420.3
  Top 0.6: 33.85,9.32 33.5,9.67
  Top 0.8: 33.5,15 C7.2 33.5,9.67
  Top 1: 33.5,15 33.5,17 32.5,18 L2.1
5VREG_VCC
  Top 0.4: MPQ4420.7 31.18,8.68 30.8,8.3 30.8,8 30.6,7.8 C6.1 30.1,6.1 R5.2
12V  (via drill 0.51)
  Top 0.4: Q2.2 23.15,29 23.35,28.7 R2.2 23.35,26.65 21.8,25.1 v21.8,24.2 22.3,24.2 23.3,23.2 C4.1
  Top 0.5: v7,36 7,36.9 7.4,37.3 9.8,37.3 11.7,39.2 13.1,39.2 13.5,39.6 R36.1
  Top 0.55: S1212BC0.5 C4.1
  Bottom 0.5: v21.8,24.2 8.6,24.2 8.1,24.7 8.1,33.9 7,35 v7,36
AGND  (via drill 0.51)
  Top 0.4: C47.2 35.12,46.6 | 35.12,46.6 C48.2 36.8,46.6 37.4,47.2 37.4,47.85 37.83,48.27 PCM5122.9 | C45.2 34.7,45.4 35.12,45.83 35.12,46.6 | 40.5,48.8 39.98,48.27 PCM5122.9 | C46.2 C49.1 | PCM5122.9 PCM5122.10 40.48,47.62 40.5,47.6 | PCM5122.3 41.23,52.17 v41.3,52.1
  Top 0.5: SH1.2 40.98,49.88 40.5,49.4 | 40.5,49.4 40.5,48.8 40.5,47.6 40.5,42.49 40.2,42.19 v39.34,42.19 | 40.5,49.4 40.5,51.3 v41.3,52.1 | v42,57.2 41.8,57.4 C52.2 C51.2 34.7,57.4 34.25,56.95 C49.1
  Bottom 0.4: v39.34,42.19 38.89,42.19 37.7,41 37.7,30.4 36.01,28.71 19.41,28.71
  Bottom 0.5: SPKR_OUT.5 SPKR_OUT.2 19.41,28.71 | v41.3,52.1 42.6,53.4 42.6,56.6 v42,57.2
BT_DATA_IO  (via drill 0.51)
  Top 0.22: PIC24FJ1024GA606.64 61.47,27.95 v61.65,27.77
  Top 0.25: v73.9,35 73.9,39.1 73.1,39.9 BC127.25
  Bottom 0.22: v73.9,35 73.9,31.3 73,30.4 68.7,30.4 68.5,30.2 68.5,28 68.27,27.77 v61.65,27.77
BT_DOUT  (via drill 0.51)
  Top 0.25: C34.2 R35.2
  Top 0.3: BC127.48 83.3,32.9 v80.9,35.3 | R35.2 59,37.8 59.8,37 v60.5,37
  Bottom 0.3: v80.9,35.3 79.2,37 v60.5,37
BT_MIC_BIAS
  Top 0.3: BC127.17 76.1,42.4 75.9,42.2 73.1,42.2 72.9,42.4 BC127.21 72.9,44.8 71.91,45.79 R24.2
BT_MIC_L  (via drill 0.51)
  Top 0.25: 78.2,55.1 MIC_IN.TIP
  Top 0.3: 78.2,55.1 78.2,58 77.02,59.12 28.43,59.12 28.1,58.8 28.1,57.6 27.74,57.24 v25.6,57.24 | BC127.20 73.68,43.32 73.68,47.27 R24.1 73.71,48.4 78.2,52.89 MIC_IN.TIP
  Top 0.4: C35.1 v9.5,45.6
  Bottom 0.4: v9.5,45.6 10.5,46.5 10.5,47.7 11.3,48.5 16.8,48.5 17.2,48.9 17.2,49.6 17.8,50.2 24.1,50.2 24.6,50.7 24.6,56.9 24.94,57.24 v25.6,57.24
BT_RST
  Top 0.3: BC127.44 R25.1
BT_URX
  Top 0.22: PIC24FJ1024GA606.5 54.55,29.27 55.15,28.67 73.33,28.67 73.78,28.22 74.57,28.22 R26.2 74.6,26.8 75.4,26 75.4,23.8 75.2,23.5 TMUX154E.2
BT_URX_RES
  Top 0.22: BC127.42 78.5,28.38 78.35,28.23 76.42,28.23 R26.1
BT_UTX
  Top 0.22: PIC24FJ1024GA606.4 55.05,29.37 55.32,29.1 59.2,29.1 59.7,29.6 R27.1 64.5,29.6 65,29.1 73.3,29.1 73.8,29.6 75.8,29.6 | 75.8,29.6 77.5,29.6 77.7,29.8 BC127.41 | 75.8,29.6 75.5,29.3 75.5,26.5 75.82,26.18 75.82,24.58 76.3,24.1 76.3,23.4 76.7,23 TMUX154E.8
BT_VREGEN
  Top 0.4: Q4.3 69,38.6 69.3,38.3 69.3,37.5
  Top 0.5: BC127.28 69.3,37.5 R23.2
BT_VREGEN_CAP_GATE
  Top 0.5: C28.2 65.8,34.9 | 65.8,34.9 R22.2 | Q4.1 65.8,34.9
DAC_CAPM
  Top 0.3: PCM5122.4 36.38,51.52 36,51.9 C50.2
DAC_CAPP
  Top 0.3: PCM5122.2 37.58,52.83 37.1,53.3 37.1,54.1 36.8,54.4 C50.1
DAC_LDOO
  Top 0.4: PCM5122.26 C55.1 C56.1
DAC_OUT_L  (via drill 0.51)
  Top 0.3: PCM5122.6 32.88,50.23 32.2,50.9 R39.1 31.15,52.45 v31.6,52.9 | v23.8,44.1 FB3.1
  Bottom 0.3: v23.8,44.1 23.8,45.9 26.1,48.2 26.1,53.5 26.4,53.8 31.4,53.8 31.6,53.6 v31.6,52.9
DAC_OUT_R
  Top 0.3: R38.1 32.3,48.9 32.88,49.58 PCM5122.7
DAC_VNEG
  Top 0.3: PCM5122.5 34.62,50.88 34.25,51.25 C49.2
EE_CS
  Top 0.22: PIC24FJ1024GA606.42 53.55,14.57 53.11,14.13 50.23,14.13 49.3,13.2 49.3,7.3 48.2,6.2 44.7,6.2 44.09,5.59 44.09,4.3 AT25M01.1
  Top 0.3: 44.09,4.3 43.99,4.2 R11.1
EE_SCK
  Top 0.22: PIC24FJ1024GA606.33 49.05,17.15 47.48,15.58 47.48,13.97 46.63,13.13 AT25M01.6
EE_SI
  Top 0.22: PIC24FJ1024GA606.34 49.55,17.05 47.91,15.41 AT25M01.5
EE_SO
  Top 0.22: PIC24FJ1024GA606.43 54.05,14.35 53.4,13.7 50.4,13.7 49.72,13.03 49.72,7.12 48.38,5.78 45.7,5.78 45.37,5.44 AT25M01.2
GND  (via drill 0.51, 0.51 pad 0.51)
  Top 1: 36,41.5 32,41.5
  Bottom 1: 32,41.5 36,41.5
  other vias: 60.5,47 48.5,56.3 83,37.5 1.4,36.6 2,22 59,7.5 88,2 8,58 8,2 82,58 86,40.5 87.5,40.5 86.8,30.5 88.8,30.5 80.8,45.5 9,23 9,36 2,2 2,58 54,7.5 52.8,24.2 79.5,18 80,15 83,40.5 83,34.5 70,50.5 73.5,50.5 70,57.5 73.5,57.5 60.5,55.75 60.5,50 58,17 88,58 31,43 39,34.5 36,40 30,56.3 29,38.5 16,23 42,47 35.5,56.3 49,47 2,15 2,8 76.4,39.8 76.5,33.7 18.5,49 46,7.5 49.6,3.3 37,5.5 22,6.25 13.2,4.5 88,45.5 7.15,43 19,20 40,24.5 31,36 25.5,30.85 48,17.5 21.5,34.7 78.5,20.5 84.5,40.5 84.5,37.5 84.5,34.5 71,31.6 83,36 84.5,36 84.5,39 83,39 89,40.5 36,27 72.5,7.8
  pour Bottom: 0.4,21 16,21 17,22 17,33 18,34 26,34 28,36 36,44 47,44 51,48 51,59.6 2,59.6 arc90 0.4,58
  pour Top: 0.4,21 16,21 17,22 17,33 18,34 26,34 28,36 36,44 47,44 51,48 51,59.6 2,59.6 arc90 0.4,58
  pour Bottom: 0.4,20 16,20 16.5,20 18,21.5 18,32.5 18.5,33 26.5,33 36.5,43 47.5,43 52,47.5 52,59.6 88,59.6 arc-90 89.6,58 89.6,39.75 86,39.75 86,31.5 89.6,31.5 89.6,2 arc-90 88,0.4 2,0.4 arc-90 0.4,2
  pour Top: 0.4,20 16,20 16.5,20 18,21.5 18,32.5 18.5,33 26.5,33 36.5,43 47.5,43 52,47.5 52,59.6 88,59.6 arc-90 89.6,58 89.6,39.75 86,39.75 86,31.5 89.6,31.5 89.6,2 arc-90 88,0.4 2,0.4 arc-90 0.4,2
I2S_CLK
  Top 0.3: WM8804.14 55.35,47.95 54.38,48.92 PCM5122.21
I2S_DOUT
  Top 0.3: WM8804.12 55.02,49.24 54.68,49.58 PCM5122.22
I2S_LRCK  (via drill 0.51)
  Top 0.3: WM8804.15 54.62,47.3 v54.21,47.71 | v49.8,50.5 46.7,50.5 46.42,50.23 PCM5122.23
  Bottom 0.3: v49.8,50.5 52.3,50.5 53,49.8 53,48.9 54.19,47.71 v54.21,47.71
I2S_SCK
  Top 0.3: PCM5122.20 52.42,48.27 54.05,46.65 WM8804.16
IBUS  (via drill 0.51)
  Top 0.3: R14.1 68.7,4.5 68.9,4.3 68.9,2.5 68.4,2 v67,2
  Bottom 0.3: PWR_IN.3 16.88,9.92 17.4,9.4 17.4,2.5 17.9,2 v67,2
IBUS_5V  (via drill 0.51)
  Top 0.3: R6.2 v28.3,10.9 | v50.95,10.3 50.95,11.8 51.7,12.5 C21.2
  Top 0.6: C21.2 TH3122.16
  Bottom 0.3: v28.3,10.9 28.7,11.3 41.7,11.3 43.8,9.2 50.7,9.2 50.95,9.5 v50.95,10.3
IBUS_EN
  Top 0.22: PIC24FJ1024GA606.59 57.75,25.45 57.29,24.99 57.29,19.89 60.91,16.27 64.33,16.27 64.9,15.7 64.9,9.31 64.19,8.6 56.6,8.6 55.82,7.82 TH3122.2
IBUS_FILT
  Top 0.3: C22.1 R14.2 61.5,4.5 60.9,3.9 TH3122.6
IBUS_URX
  Top 0.22: PIC24FJ1024GA606.45 55.05,14.97 55.3,14.72 61.68,14.72 62.17,14.23 TH3122.10
IBUS_USTA
  Top 0.22: PIC24FJ1024GA606.46 55.55,15.35 55.75,15.15 63.05,15.15 63.45,14.75 TH3122.9
IBUS_UTX
  Top 0.22: PIC24FJ1024GA606.44 54.55,14.75 55,14.3 60.5,14.3 60.9,13.9 TH3122.11
MCU_MCLR
  Top 0.22: PICKIT.6 51.56,37.54 53.5,35.6 53.5,33.3 53.7,33.1 R12.2 54.5,32.3 53.55,31.35 PIC24FJ1024GA606.7
MCU_MCLR_RES
  Top 0.3: R12.1 C18.1 R13.2
MCU_ON_LED  (via drill 0.51)
  Top 0.22: PIC24FJ1024GA606.60 60.25,25.95 60.5,26.2 60.5,26.5 60.8,26.8 v63.2,26.8
  Top 0.25: R19.2 v82.2,28.5
  Bottom 0.22: v82.2,28.5 81.9,28.5 81.6,28.2 81.6,25.5 81.4,25.3 72.9,25.3 72.5,25.7 72.5,26.8 72.1,27.2 63.6,27.2 v63.2,26.8
MCU_ON_LED_RES
  Top 0.3: R19.1 PWR.+
MCU_PGC
  Top 0.22: PIC24FJ1024GA606.15 49.55,31.65 47.08,34.12 PICKIT.5
MCU_PGD
  Top 0.22: PIC24FJ1024GA606.16 49.05,31.55 46.9,33.7 44.8,33.7 44.54,33.96 PICKIT.3
MCU_RECOV
  Top 0.22: RECOVERY.2 R15.1 PIC24FJ1024GA606.53
MCU_SCK3  (via drill 0.51)
  Top 0.22: PIC24FJ1024GA606.2 56.05,31.25 56.3,31.5 61.59,31.5 62.64,32.55 62.64,35.6 | 62.64,35.6 62.64,43.52 63.16,44.04 WM8804.1 | 62.64,35.6 63.7,36.66 v63.7,37.9
  Top 0.25: PCM5122.12 38.02,46.33 37.65,45.96 37.65,42.05 39.35,40.35 52.35,40.35 54.5,38.2 v55,38.2
  Top 0.3: WM8804.1 R33.2
  Bottom 0.25: v63.7,37.9 63.4,38.2 v55,38.2
MCU_SDA3
  Top 0.22: PIC24FJ1024GA606.3 55.55,31.35 56.12,31.92 61.42,31.92 62.2,32.7 62.2,35.6 | WM8804.3 62.84,45.34 62.2,44.7 62.2,35.6 | 61.67,36.13 62.2,35.6
  Top 0.25: PCM5122.11 38.03,46.98 37.2,46.15 37.2,41.85 39.15,39.9 52.1,39.9 55.87,36.13 61.67,36.13
  Top 0.3: WM8804.3 65.03,45.34 66,44.38 R31.2
MCU_TEL_MUTE
  Top 0.22: PIC24FJ1024GA606.62 49.55,26.95 48.85,27.65 48.85,28.47 47.79,29.53 47.79,31.01 46.83,31.98 36.62,31.98 36.25,32.35 R4.2
  Top 0.7: R4.2 Q1.1
MCU_TEL_ON
  Top 0.22: PIC24FJ1024GA606.18 45.75,27.45 45.4,27.8 45.4,30.1 44.05,31.45 32.65,31.45 32.1,30.9 32.1,28.6 31.8,28.3 R3.2
  Top 0.4: Q3.1 R3.2
MCU_URX
  Top 0.22: PIC24FJ1024GA606.50 68.99,20.95 70.74,22.7 R16.1
  Top 0.25: TMUX154E.3 72.6,23 72.3,22.7 R16.1
MCU_UTX  (via drill 0.51)
  Top 0.22: PIC24FJ1024GA606.49 62.65,20.45 62.8,20.3 62.8,19.2 63.7,18.3 v66.2,18.3
  Top 0.25: R18.1 TMUX154E.7 76.34,22.5 v76.04,22.2
  Bottom 0.25: v76.04,22.2 76.04,21.24 75.6,20.8 73.3,20.8 70.8,18.3 v66.2,18.3
MCU_VCAP
  Top 0.22: PIC24FJ1024GA606.56 C19.1
SPDIF_OUT  (via drill 0.51)
  Top 0.3: C29.1 47.65,41.75 v47.3,42.1
  Bottom 0.3: v47.3,42.1 47.3,57.94 46.64,58.6 11.2,58.6 9.3,56.7 9.3,54.1 7.95,52.75 DSP_OUT.P$1
SPDIF_RX
  Top 0.3: WM8804.20 C34.1
SPKR_OUT_L
  Top 0.3: C46.1 R39.2 27.2,50.9 26.7,50.4 26.7,47.2 26.7,38.4 25.2,36.9 17.4,36.9 14.8,34.3 14.8,27.4 13.57,26.17 SPKR_OUT.1
SPKR_OUT_R
  Top 0.3: SPKR_OUT.4 11.67,24.8 14.2,24.8 15.75,26.35 15.75,33.9 17.72,35.87 25.62,35.87 27.66,37.91 27.66,48.15 28.41,48.9 R38.2 C45.1
SYS_DTR  (via drill 0.51)
  Top 0.22: PIC24FJ1024GA606.52 57.97,21.95 57.71,21.69 57.71,20.07 60.28,17.5 v62.4,17.5
  Top 0.25: v67.2,15.8 67.91,15.09 67.91,9.39 72.14,5.16 FT231X.1
  Bottom 0.25: v67.2,15.8 65.5,17.5 v62.4,17.5
SYS_RX_LED  (via drill 0.51)
  Top 0.25: FT231X.17 74.05,8.45 v74.3,8.2 | R20.2 86.5,17.3 86.2,17 83.2,17 v82.1,15.9
  Bottom 0.25: v74.3,8.2 75.3,7.2 80.45,7.2 80.65,7.4 80.65,14.45 v82.1,15.9
SYS_RX_LED_RES  (via drill 0.51)
  Top 0.25: RX.- 89.04,24.04 v89,24 | R20.1 85.5,19.9 v85,20.4
  Bottom 0.25: v85,20.4 85,21.1 85.7,21.8 88.7,21.8 89,22.1 v89,24
SYS_TX_LED  (via drill 0.51)
  Top 0.25: FT231X.10 77.86,5.76 v78.2,6.1 | R21.2 88.5,16.6 87.7,15.8 v84.1,15.8
  Bottom 0.25: v78.2,6.1 80.6,6.1 81.6,7.1 81.6,13.3 v84.1,15.8
SYS_TX_LED_RES
  Top 0.25: TX.- 89.04,21.44 88.5,20.9 R21.1
SYS_UART_SEL
  Top 0.22: PIC24FJ1024GA606.51 68.75,21.45 70.2,22.9 70.2,23.7 70.5,24 R17.2
  Top 0.25: TMUX154E.1 R17.2
SYS_URX  (via drill 0.51)
  Top 0.25: TMUX154E.6 77.3,22 77.1,21.8 77.1,19.9 76.8,19.6 73.62,19.6 68.82,14.8 68.82,9.79 69.11,9.5 v70.4,9.5 | v74.04,5.76 74.04,4.33 FT231X.4
  Bottom 0.25: v70.4,9.5 71.3,8.6 71.3,7.1 72.1,6.3 73.5,6.3 v74.04,5.76
SYS_USB_DN
  Top 0.25: USB.2 80.55,9.35 79.4,8.2 77.89,8.2 77.2,8.89 77.2,9.66 FT231X.12
SYS_USB_DP
  Top 0.25: USB.3 80.56,10 79.21,8.65 78.1,8.65 77.85,8.9 77.85,9.67 FT231X.11
SYS_UTX
  Top 0.25: TMUX154E.4 74.54,22.5 74.78,22.26 74.78,20.23 74.61,20.06 73.44,20.06 68.36,14.99 68.36,9.58 69.54,8.4 71.8,8.4 72.14,8.74 FT231X.20
TEL_AMP_IN
  Top 0.4: C43.1 FB3.2
TEL_AMP_INL
  Top 0.4: PAM8406.7 17.17,45.83 18.4,44.6 R37.2
TEL_AMP_INL_CAP_RES
  Top 0.4: R37.1 C43.2
TEL_AMP_OUT_L+
  Top 0.4: PAM8406.1 FB1.1
TEL_AMP_OUT_L-
  Top 0.4: PAM8406.3 17.51,50.91 18.4,51.8 18.4,53.3 19.8,54.7 21,54.7 21.4,55.1 FB2.1
TEL_AMP_SHDN  (via drill 0.51)
  Top 0.22: v36.1,34 36.1,33.1 36.8,32.4 47,32.4 48.22,31.19 48.22,29.7 49.27,28.64 49.27,27.82 49.65,27.45 PIC24FJ1024GA606.63
  Top 0.3: PAM8406.12 22.33,48.37 v25.2,45.5
  Bottom 0.3: v36.1,34 36.1,38.1 35.2,39 32.9,39 27.72,44.18 26.52,44.18 v25.2,45.5
TEL_AMP_VREF
  Top 0.4: PAM8406.8 C44.1
TEL_MIC_L_OUT
  Top 0.4: TCU_IO.3 0.45,41.57 0.45,39.6 1.15,38.9 8.9,38.9 9.5,39.5 C35.2
  Top 0.5: C35.2 R36.2
TEL_MUTE_IO  (via drill 0.51)
  Top 0.3: Q1.3 29.9,32.4 29.7,32.2 v28.2,32.2
  Bottom 0.3: TCU_IO.6 4.52,38.58 5,38.1 23.2,38.1 23.5,37.8 23.5,32.7 24,32.2 v28.2,32.2
TEL_ON
  Top 0.4: R1.1 20.3,28.8 20.5,29 20.5,31.25 20.9,31.65 Q2.3
TEL_ON_EN  (via drill 0.51)
  Top 0.4: v19.4,27.25 19.4,27.36 19.64,27.69 R2.1 21.55,28.7 21.85,29 Q2.1 | Q3.3 25.35,29.25 24.88,28.6 v24.88,27.3
  Bottom 0.4: v19.4,27.25 19.4,26.6 19.6,26.4 24.4,26.4 24.88,26.7 v24.88,27.3
TEL_ON_IO  (via drill 0.51)
  Top 0.4: R1.2 v19.25,31.82 v19.24,31.83
  Bottom 0.3: TCU_IO.5 1.98,37.81 2.29,37.5 18.94,37.5 19.24,37.2 v19.24,31.83
TEL_OUT_L+
  Top 0.4: TCU_IO.1 1.98,46.38 3,47.4 8.5,47.4 9.7,48.6 9.7,54.4 13.2,57.9 FB1.2 C39.1
TEL_OUT_L-  (via drill 0.51)
  Top 0.4: TCU_IO.2 7.64,45.64 10.3,48.3 10.3,53.1 v12.3,55.1 | C40.1 FB2.2 22.7,57.9 23.2,57.4 v23.2,56.6
  Bottom 0.4: v23.2,56.6 23.2,55.8 22.8,55.4 12.6,55.4 v12.3,55.1
USB_3V3
  Top 0.3: C27.1 76.85,10.75 76.59,10.49 76.59,10.1 | 76.59,10.1 FT231X.13 | FT231X.14 75.95,9.5 | 75.95,9.5 75.95,9.3 | 75.95,9.3 75.95,9.04 | 75.95,9.04 75.95,7.45 75.6,7.1 73.1,7.1 72.8,6.8 72.8,5.7 73.41,5.09 FT231X.3 | FT231X.14 FT231X.13 | 75.95,9.3 76.21,9.3 76.35,9.45 | FT231X.14 76.24,9.96 | 76.24,9.96 76.37,10.1 76.59,10.1 | FT231X.13 76.52,9.68 76.24,9.96 | 76.35,9.45 76.3,9.5 75.95,9.5 | FT231X.13 76.35,9.45 | FT231X.13 75.95,9.04
USB_5V
  Top 0.4: USB.1 82.3,8.7 82,8.4 D2.A
VBAT
  Top 1: PWR_IN.2 6.26,12.46 7,13.2 7,16.3 8.7,18 D1.A
VBAT_DIODE
  Top 1: D1.C 16,18 16.65,17.35 F1.IN
VBAT_FUSE
  Top 1: L1.1 10.35,10 F1.OUT
VIN  (via drill 0.51)
  Top 0.4: MPQ4420.2 C8.1
  Top 0.5: v32.4,22.2 32.4,22.6 31.8,23.2 C5.1
  Top 0.55: C5.1 S1212BC0.1
  Top 0.65: TH3122.1 C23.1
  Top 0.7: 50.8,2.5 C23.1 | 42,1.3 39,1.3
  Top 0.75: 50.8,2.5 49.6,1.3 42,1.3
  Top 0.8: C9.1 C8.1 | C10.1 41.2,7.5 40.5,6.8 39.6,6.8 39,6.2 39,1.3
  Top 0.9: C10.1 C9.1
  Top 1: 39,1.3 25.6,1.3 v23.9,3 C1.1 20.9,3 17.9,6 L1.4
  Bottom 0.5: v23.9,3 23.9,13.3 25.6,15 30.9,15 32.4,16.5 v32.4,22.2
WM_CSB
  Top 0.3: R34.2 61,44.7 62.95,46.65 WM8804.5
WM_GPO0
  Top 0.3: R32.2 65.8,42.5 65.5,42.8 65.5,44.15 64.95,44.7 WM8804.2
WM_RESETB
  Top 0.3: WM8804.6 65.11,47.3 65.4,47 65.4,46.5 65.65,46.25 R30.2
WM_SPDIF_TX_RES
  Top 0.3: WM8804.17 R29.2
WM_SPDIF_TX_RES2
  Top 0.3: R29.1 R28.2 C29.2
WM_XIN
  Top 0.3: WM8804.11 C31.1 56.88,53.23 55.7,54.4 X1.2
WM_XOP
  Top 0.3: WM8804.10 C32.1 64.12,53.23 64.13,53.23 65.3,54.4 X1.1

## Text on the board
tNames: 5v | GND | MCLR | BlueBus | HW VER. 1.7 | Assembled in U.S.A. | 3.3v | PGD | PGC
bNames: TELNF+ | TELNF-- | MIC+ | MIC- | TELON | MUTE | NC | NC | AGND | AGND | SPKR_R | SPKR_L | GND | 12v | IBus
MfgOptions: Num. Layers | 2 | Board Dimms | 90mm x 60mm | Board Thickness | 1.6mm | Copper Oz | 1oz | Solder Sides | Both | Silkscreen Sides | Both | Silkscreen Color | White | Soldermask | Blue | Surface Finish | ENIG